# EAGLE board PCB (EAGLE 9.7.0)
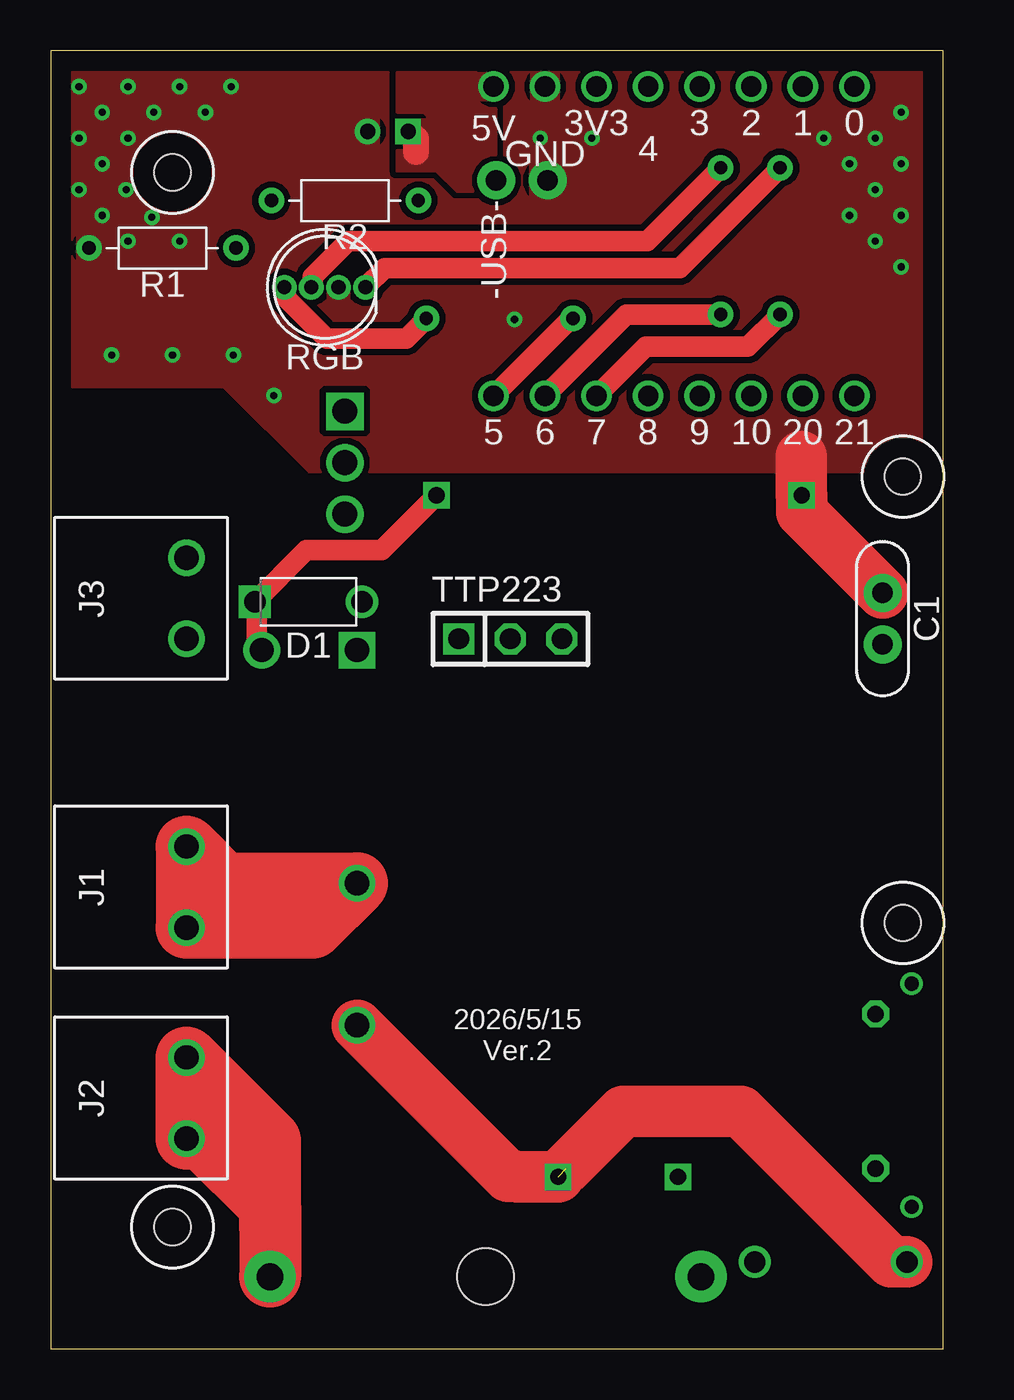
[diagram p0: board, top side]
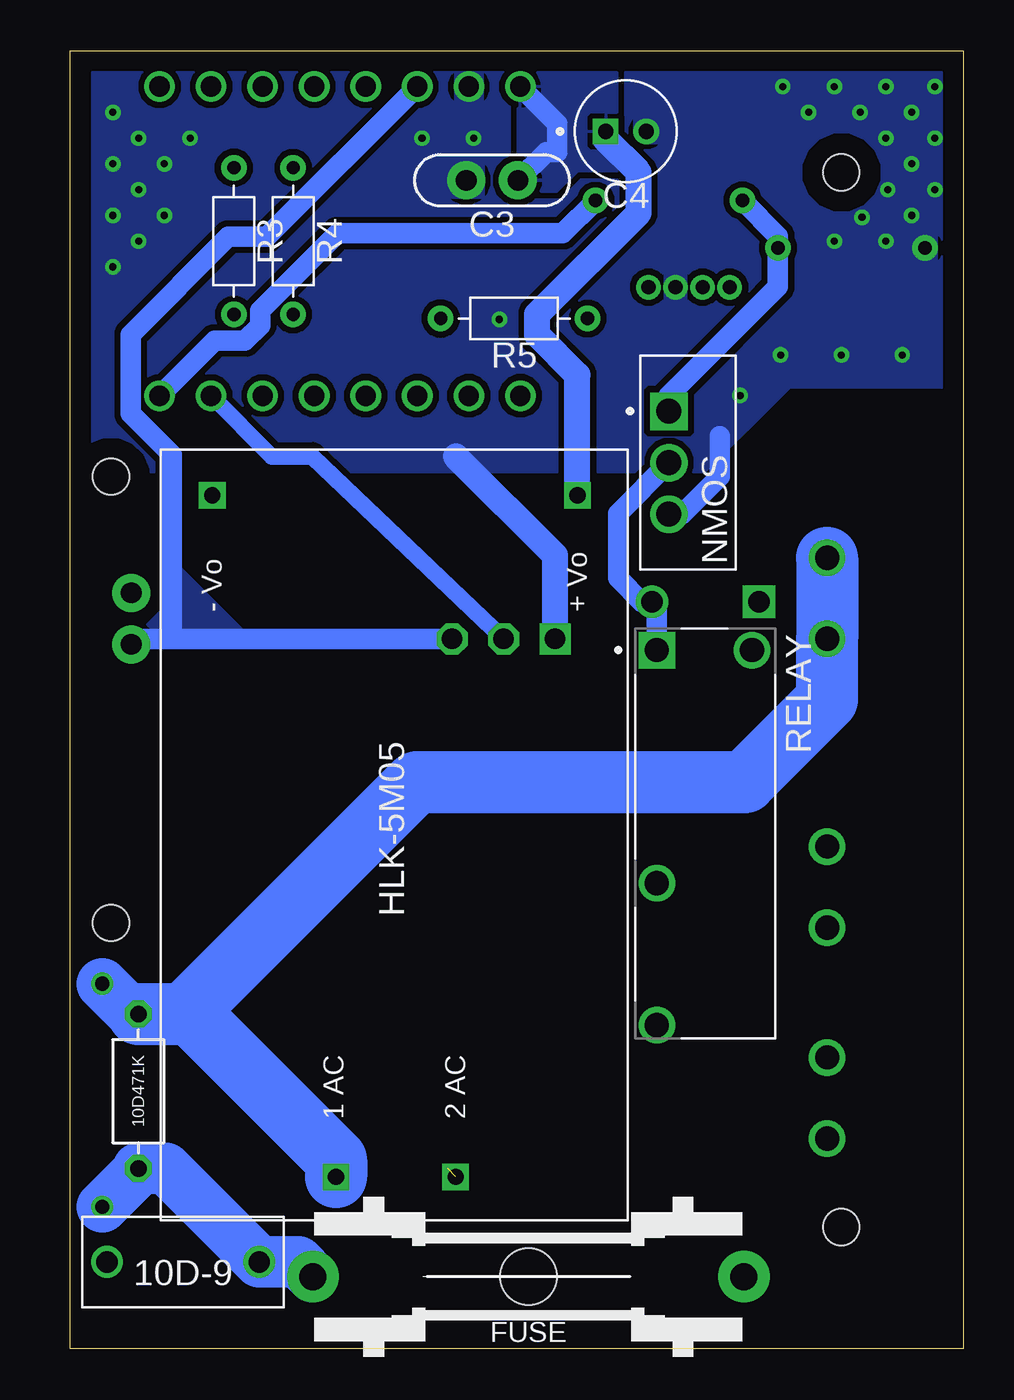
[diagram p1: board, bottom side, seen from below]

Size 44 x 64 mm. Coordinates in mm from the lower left corner, seen from the top.
Outline: 0,64 0,0 44,0 44,64 0,64
Copper layers (1*16): Top / Bottom
Stack-up Default Layer Stack: Top SilkScreen Epoxy Ink / Top SolderMask SR:Green 0.0254mm Dk 4 / Top Surface Finish Lead-Free 0.02mm / Top CuFoil:007 0.035mm / Dielectric-1 User Defined 1.5mm / Bottom CuFoil:007 0.035mm / Bottom Surface Finish Lead-Free 0.02mm / Bottom SolderMask SR:Green 0.0254mm Dk 4 / Bottom SilkScreen Epoxy Ink
Design rules: minimum copper width 6mil, minimum drill size 0.35mm, copper clearance wire_polygon to wire_polygon 6mil, copper clearance wire_polygon to pad_smd 6mil, copper clearance wire_polygon to via 6mil, copper clearance pad_smd to pad_smd 6mil, copper clearance pad_smd to via 6mil, copper clearance via to via 6mil, copper clearance smd to pad (same net) 6mil, copper clearance smd to via (same net) 6mil, copper clearance smd to smd (same net) 6mil, dimension clearance 40mil, via restrict clearance 0mil, restrict clearance 0mil, drill distance 6mil, keepout clearance 0mil
Holes 1.78 mm at 6,58 6,6 42,21 42,43

## Footprints (pad centres in the part's own frame; a part is rotated, then mirrored left to right if it is on the bottom)
R-7,5 = drill 0.813 octagon: 1 -3.81,0; 2 3.81,0
NTCTHERMISTOR = drill 1.05 pad 1.4: 1 -3.75,0; 2 3.75,0
CAP-THRU-2.54MM = drill 1.016 pad 1.88: 1 -1.27,0; 2 1.27,0
CAPPRD200W50D500H1100 = drill 0.75 pad 1.1: N 1,0 | drill 0.75 pad 1.1 square: P -1,0
DIOAD1036W78L470D235 = drill 1.06: A 2.64,0 | drill 1.06 square: C -2.64,0
GSH15 = drill 1.321 pad 2.54: 1 -10.62,0; 2 10.62,0 | hole 2.794: 0,0
TERMBLK_508-2N = drill 1.2: 1 -2,0; 2 2,0
TO254P1054X469X1930-3 = drill 1.23 pad 1.85 square: 1 -2.54,-0.94 | drill 1.23 pad 1.85: 2 0,-0.94; 3 2.54,-0.94
RESAD724W46L381D178B = drill 0.66 pad 1.26: 1 -3.62,0; 2 3.62,0
RELAY_ALDP105 = drill 1.2 square: 1 -9.05,-2.4 | drill 1.2: 2 -9.05,2.3; 3 2.45,-2.4; 4 9.45,-2.4
LED-RGB-RCGB-5MM = drill 0.7: B 2,0; C -0.67,0; G 0.67,0; R -2,0
1X03 = drill 1.016 square: 1 -2.54,0 | drill 1.016 octagon: 2 0,0; 3 2.54,0
HLK-5M05 = drill 0.8 square: 1 -16.85,-2.93; 2 -16.85,2.97; 3 16.75,9.07; 4 16.75,-8.93
ESP32SUPERMINI_ESP32-SUPERMINI = drill 1: 0 -11.43,9.525; 1 -11.43,6.985; 2 -11.43,4.445; 3 -11.43,1.905; 3V3 -11.43,-3.175; 4 -11.43,-0.635; 5 3.81,-8.255; 5V -11.43,-8.255; 6 3.81,-5.715; 7 3.81,-3.175; 8 3.81,-0.635; 9 3.81,1.905; 10 3.81,4.445; 20 3.81,6.985; 21 3.81,9.525; GND -11.43,-5.715

## Placement (x,y rotation side)
10D471K  VARISTOR-7,5  [R-7,5]  40.66,12.7 90 bottom
10D-9  NTCTHERMISTOR  [NTCTHERMISTOR]  38.45,4.28 180 bottom
C1  [CAP-THRU-2.54MM]  41,36 270 top
C3  [CAP-THRU-2.54MM]  23.22,57.61 180 bottom
C4  EEUFC0J101  [CAPPRD200W50D500H1100]  16.62,60.02 0 bottom
D1  1N5819  [DIOAD1036W78L470D235]  12.7,36.83 0 top
FUSE  [GSH15]  21.43,3.56 180 bottom
J1  2828XX-2282837-2  [TERMBLK_508-2N]  6.7,22.76 270 top
J2  2828XX-2282837-2  [TERMBLK_508-2N]  6.7,12.37 270 top
J3  2828XX-2282837-2  [TERMBLK_508-2N]  6.7,37 270 top
NMOS  IRLZ44N  [TO254P1054X469X1930-3]  13.56,43.69 270 bottom
R1  [RESAD724W46L381D178B]  5.51,54.27 180 top
R2  [RESAD724W46L381D178B]  14.5,56.61 180 top
R3  [RESAD724W46L381D178B]  35.95,54.61 90 bottom
R4  [RESAD724W46L381D178B]  33.02,54.61 90 bottom
R5  [RESAD724W46L381D178B]  22.13,50.8 0 bottom
RELAY  ALDP105  [RELAY_ALDP105]  12.7,25.4 270 bottom
RGB  LED-RGBRCGB-PTH  [LED-RGB-RCGB-5MM]  13.51,52.34 180 top
TTP223  [1X03]  22.65,35 0 top
U$1  5VDC/5W  [HLK-5M05]  27.94,25.32 90 bottom
U$3  ESP32SUPERMINI  [ESP32SUPERMINI_ESP32-SUPERMINI]  30.08,50.8 270 top

## Library data of the parts
10D471K = varistor
10D-9 = B57237S0100M000; AVAILABILITY: In Stock; CHECK_PRICES: https://www.snapeda.com/parts/B57237S0100M000/EPCOS/view-part/?ref=eda; DESCRIPTION: Thermistor NTC 10 Ohm 20% 2-Pin Radial 3060K Bulk Automotive; MF: EPCOS; MP: B57237S0100M000; PACKAGE: None; PRICE: None; SNAPEDA_LINK: https://www.snapeda.com/parts/B57237S0100M000/EPCOS/view-part/?ref=snap
C1 C3 = Tinkercad
C4 = EEUFC0J101; AVAILABILITY: In Stock; CHECK_PRICES: https://www.snapeda.com/parts/EEUFC0J101/Panasonic/view-part/?ref=eda; DESCRIPTION: CAP ALUM 100UF 20% 6.3V RADIAL; MF: Panasonic; MP: EEUFC0J101; PACKAGE: RADIAL-2 Panasonic; PRICE: None; PURCHASE-URL: https://www.snapeda.com/api/url_track_click_mouser/?unipart_id=5796939&manufacturer=Panasonic&part_name=EEUFC0J101&search_term=capacitor 100uf; SNAPEDA_LINK: https://www.snapeda.com/parts/EEUFC0J101/Panasonic/view-part/?ref=snap
D1 = 1N5819; AVAILABILITY: In Stock; CHECK_PRICES: https://www.snapeda.com/parts/1N5819/taiwan/view-part/?ref=eda; DESCRIPTION: 1A, 40V, Automotive Planar Schottky; MF: Taiwan Semiconductor; MP: 1N5819; PACKAGE: DO-41-2 Taiwan Semiconductor; PRICE: None; PURCHASE-URL: https://www.snapeda.com/api/url_track_click_mouser/?unipart_id=4810715&manufacturer=Taiwan Semiconductor&part_name=1N5819&search_term=1n5819; SNAPEDA_LINK: https://www.snapeda.com/parts/1N5819/taiwan/view-part/?ref=snap
FUSE = fuses; MPN: 64900001039; OC_FARNELL: 1271673; OC_NEWARK: 02P0318
J1-J3 = Connector; CATEGORY: Connectors; DATASHEET: https://www.te.com/usa-en/product-282837-2.datasheet.pdf; DESCRIPTION: 2 Position Wire to Board Terminal Block Horizontal with Board 0.200" (5.08mm) Through Hole; MANUFACTURER: TE Connectivity AMP Connectors; MPN: 282837-2; OPERATING_TEMPERATURE: -40°C ~ 105°C; PACKAGE_SIZE: NA; PACKAGE_TYPE: Through Hole; PART_STATUS: Active; PITCH: 0.200" (5.08mm); ROHS: Compliant; SERIES: Buchanan; SUBCATEGORY: Terminal Blocks; TYPE: Screw Terminal - Rising Cage Clamp Side Wire Entry
NMOS = IRLZ44N; AVAILABILITY: In Stock; CHECK_PRICES: https://www.snapeda.com/parts/IRLZ44N/Infineon/view-part/?ref=eda; DESCRIPTION: N-Channel 55 V 47A (Tc) 3.8W (Ta), 110W (Tc) Surface Mount D2PAK; MF: Infineon Technologies; MP: IRLZ44N; PACKAGE: TO-220 Infineon; PRICE: None; SNAPEDA_LINK: https://www.snapeda.com/parts/IRLZ44N/Infineon/view-part/?ref=snap
R1-R5 = Resistor; CATEGORY: Resistors; DESCRIPTION: Axial Resistor 7.24 mm pitch 3.81 mm body length 1.78 mm body diameter; PACKAGE_SIZE: Axial; PACKAGE_TYPE: Through Hole
RELAY = ALDP105; AVAILABILITY: In Stock; CHECK_PRICES: https://www.snapeda.com/parts/ALDP105/Panasonic/view-part/?ref=eda; DESCRIPTION: Power RelayLD-P Relay | Panasonic Electronic Components ALDP105; MF: Panasonic; MP: ALDP105; PACKAGE: None; PRICE: None; SNAPEDA_LINK: https://www.snapeda.com/parts/ALDP105/Panasonic/view-part/?ref=snap
RGB = rgb
TTP223 = pinhead
U$1 = HLK-5M05; SIZE: 23x38(mm)
U$3 = ESP32C3supermini

## Nets
GND: C1.1 C3.2 C4.N NMOS.3 R1.2 RGB.C TTP223.1 U$1.3 U$3.GND
N$2: FUSE.1 J2.1 J2.2
N$3: D1.A NMOS.2 RELAY.1
N$4: C1.2 TTP223.3 U$3.3V3
N$5: J1.1 J1.2 RELAY.3
N$7: TTP223.2 U$3.20
N$8: NMOS.1 R1.1 R2.2
N$9: R4.2 RGB.G
N$10: R3.1 U$3.7
N$11: R3.2 RGB.R
N$12: R5.2 RGB.B
N$13: C3.1 C4.P D1.C RELAY.2 U$1.4 U$3.5V
N$14: R2.1 U$3.21
N$15: 10D471K.2 J3.1 J3.2 U$1.2
N$16: 10D-9.2 RELAY.4 U$1.1
N$17: R4.1 U$3.6
N$18: R5.1 U$3.5
N$19: 10D471K.1 10D-9.1 FUSE.2

## Tracks (layer width: path | path; a pad name or v marks a point on that pad's centre or on a via)
GND  (via drill 0.35 pad 0.25, 0.35 pad 0.5)
  Top 2.54: C1.1 37.01,41.26 U$1.3 37,42.09 37,44
  Bottom 1.016: NMOS.3 13.85,41.15 12,43 12,45
  Bottom 1.27: TTP223.1 20.11,39.11 25,44
  other vias: 2.54,60.96 2.54,58.42 3.81,59.69 5.08,60.96 24.13,59.69 26.67,59.69 6.35,54.61 3.81,54.61 3,49 6.35,62.23 7.62,60.96 8.89,62.23 3.81,62.23 2.54,55.88 1.39,57.15 1.39,59.69 1.39,62.23 40.64,59.69 39.37,58.42 41.91,58.42 40.64,57.15 41.91,55.88 39.37,55.88 40.64,54.61 41.91,53.34 41.91,60.96 38.1,59.69 22.86,50.75 9,49 11,47 6,49 4.99,55.79 3.72,57.15
  pour Bottom (isolate 0.305, rank 2): -1.27,64.77 44.45,64.77 44.45,43.18 12.7,43.18 8.55,47.33 -1.27,47.33
  pour Top (isolate 0.305, rank 2): -1.27,64.77 44.45,64.77 44.45,43.18 12.7,43.18 8.51,47.37 -1.27,47.37
N$2
  Top 3.048: 10.81,6 10.81,10.26 J2.1 J2.2 6.76,10.43 7.42,10.43 10.81,7.04 FUSE.1
N$3
  Bottom 1.016: RELAY.1 15.1,36.59 D1.A 15.83,36.83 17,38 17,41.19 NMOS.2
N$4
  Bottom 1.016: U$3.3V3 34.31,54.82 36.21,54.82 41.02,50.01 41.02,46.1 39,44.08 39,35 | TTP223.3 39,35 | 39,35 40.73,35 C1.2
  pour Bottom: 41,35 39,37 39,39 35,35
N$5
  Top 3.048: J1.1 J1.2 12.91,20.76 RELAY.3 8.51,22.95 J1.1
N$7
  Bottom 0.813: TTP223.2 32.09,44 34.08,44 U$3.20
N$8
  Bottom 1.016: NMOS.1 14.5,46.99 9.13,52.36 R1.1 9.13,54.86 R2.2
N$9
  Top 1.016: R4.2 29.39,54.6 14.66,54.6 12.92,52.86 12.92,52.42 RGB.G
N$10
  Top 1.016: R3.1 34.36,49.4 29.32,49.4 U$3.7
N$11
  Top 1.016: R3.2 31,53.29 16.46,53.29 RGB.R
N$12
  Top 1.016: RGB.B 11.58,52.27 11.58,51.82 13.59,49.8 17.51,49.8 R5.2
N$13
  Top 1.016: RELAY.2 10.15,34.7 10.15,36.74 D1.C 12.6,39.37 16.3,39.37 U$1.4 19,42.09
  Top 1.27: C4.P 18,59.64 18,59
  Bottom 1.016: C3.1 20.56,59 20,59 20,60.41 U$3.5V
  Bottom 1.27: U$1.4 19.01,48.01 21,50 21,51 16,56 16,58 17.62,59.62 C4.P
  pour Bottom: 17,63 17,58 19,58 20,57 22,57 22,63
  pour Top: 17,63 17,58 19,58 20,57 22,57 22,63
N$14
  Bottom 1.016: U$3.21 36.9,49.7 35.41,49.7 34.66,50.45 34.66,51.18 30.84,55 19.73,55 R2.1
N$15  (via drill 0.7)
  Bottom 2.54: v42.43,18 40.94,16.51 10D471K.2
  Bottom 3.048: 10D471K.2 38.1,16.51 | 38.1,16.51 30.91,9.32 U$1.2 | 38.1,16.51 38.24,16.65 26.95,27.94 10.76,27.94 6.7,32 J3.2 J3.1
N$16  (1 unrouted)
  Top 2.54: RELAY.4 22.54,8.51 22.96,8.51 22.99,8.47 U$1.1 | 10D-9.2 41.44,4.28 34.02,11.7 28.21,11.7 25.4,8.89
N$17
  Top 1.016: U$3.6 28.36,50.99 R4.1
N$18
  Top 1.016: U$3.5 25.64,50.8 R5.1
N$19  (via drill 0.7)
  Bottom 2.54: FUSE.2 32.78,4.28 10D-9.1 39.3,8.89 40.54,8.89 | 40.54,8.89 10D471K.1 | v42.43,7 40.54,8.89

## Text on the board
SilkscreenTop: 2026/5/15 / Ver.2